# Altium PCB ESC.PcbDoc_Small.PcbDoc (part 1 of 2)
Units mil, origin at the board's own origin, x right, y up, seen from the top; angles counter-clockwise.
Board outline 6500 x 4500 mil, 2 copper layers (Top Layer, Bottom Layer), stack 33.512 mil thick; 85 components, 105 nets, 407 pads, 133 vias.
Unrouted connection lines stored in the file: 8.
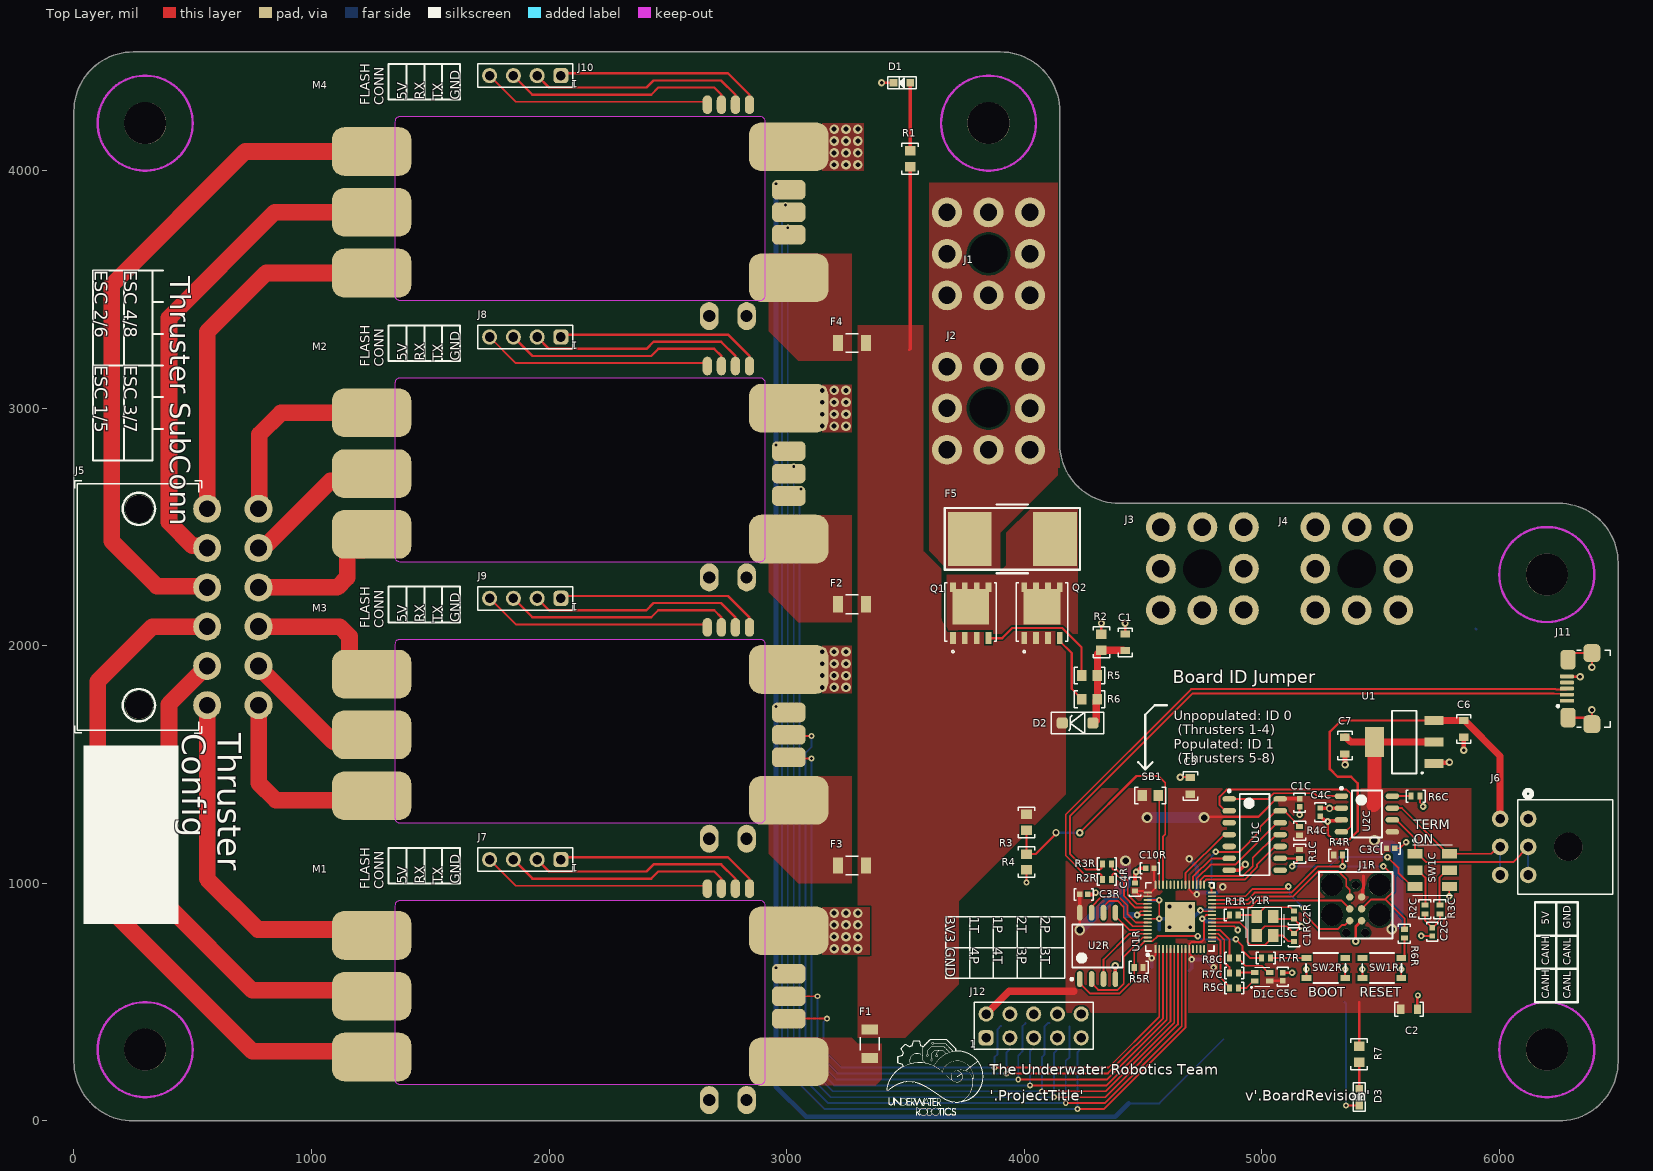
[diagram p0: Top Layer view]
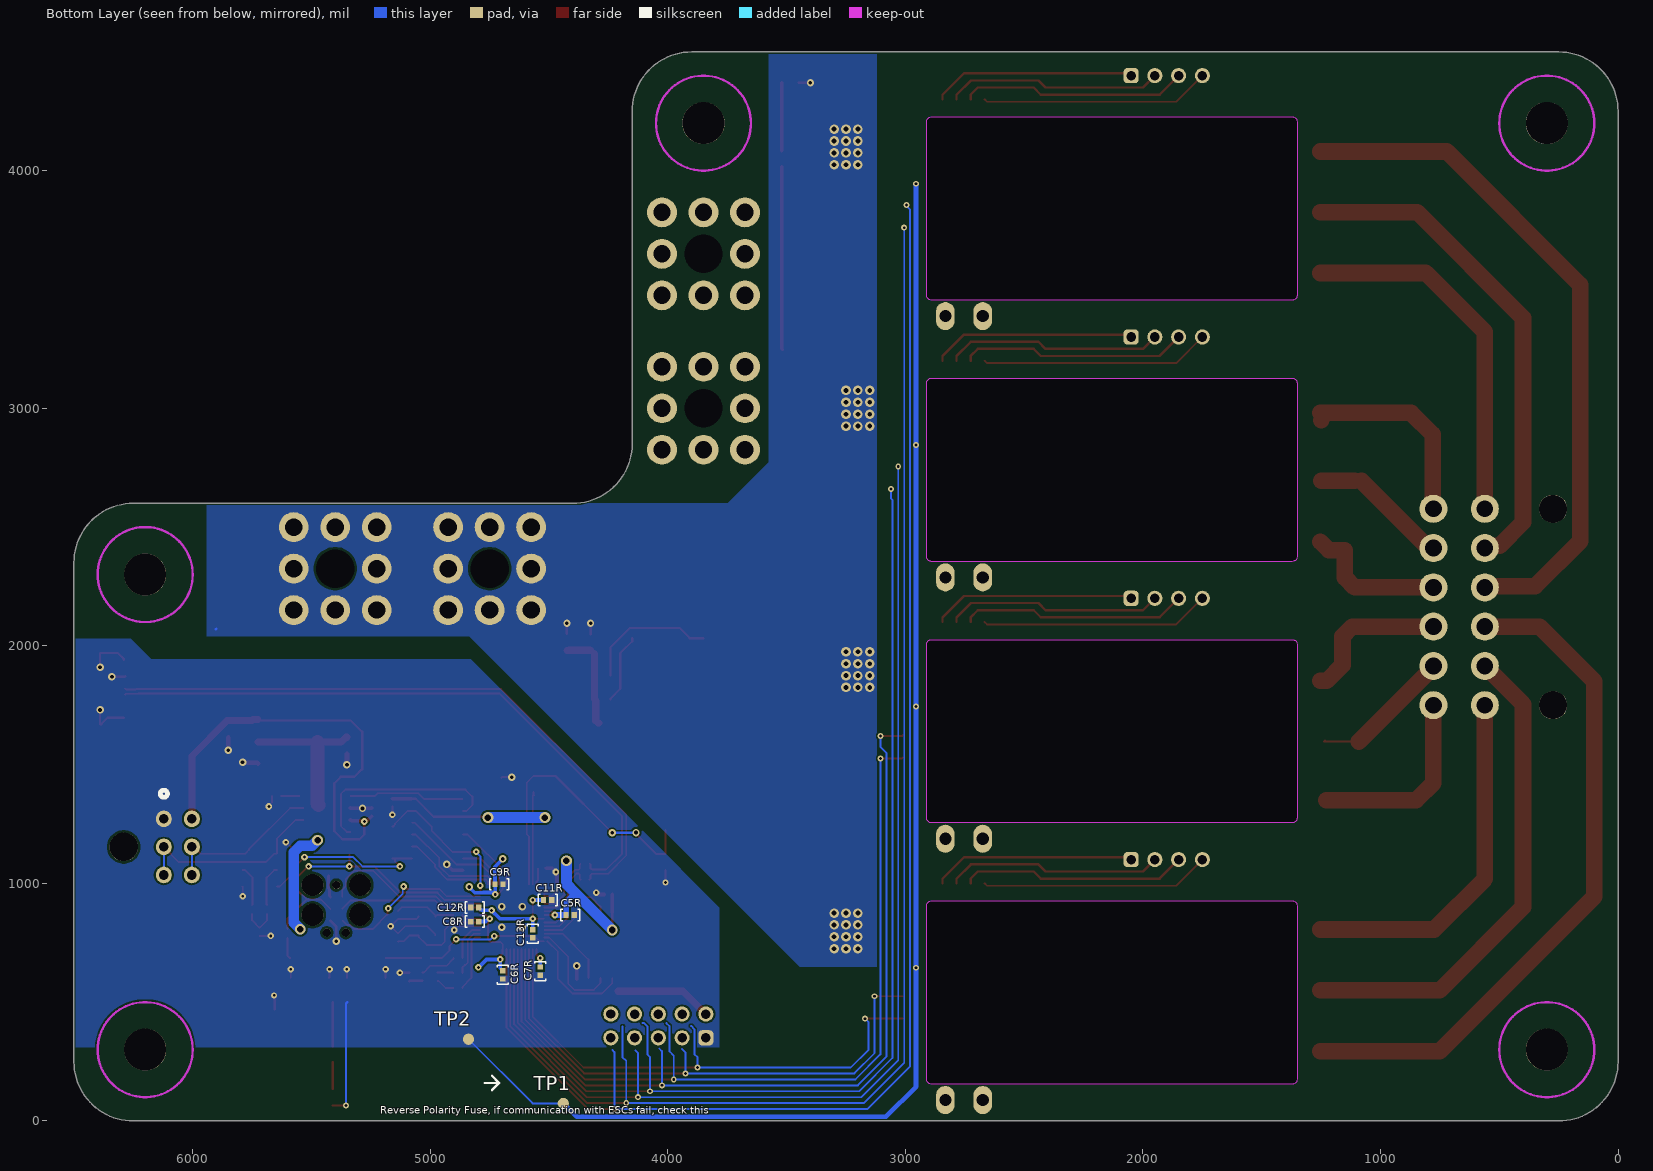
[diagram p1: Bottom Layer view, seen from below]
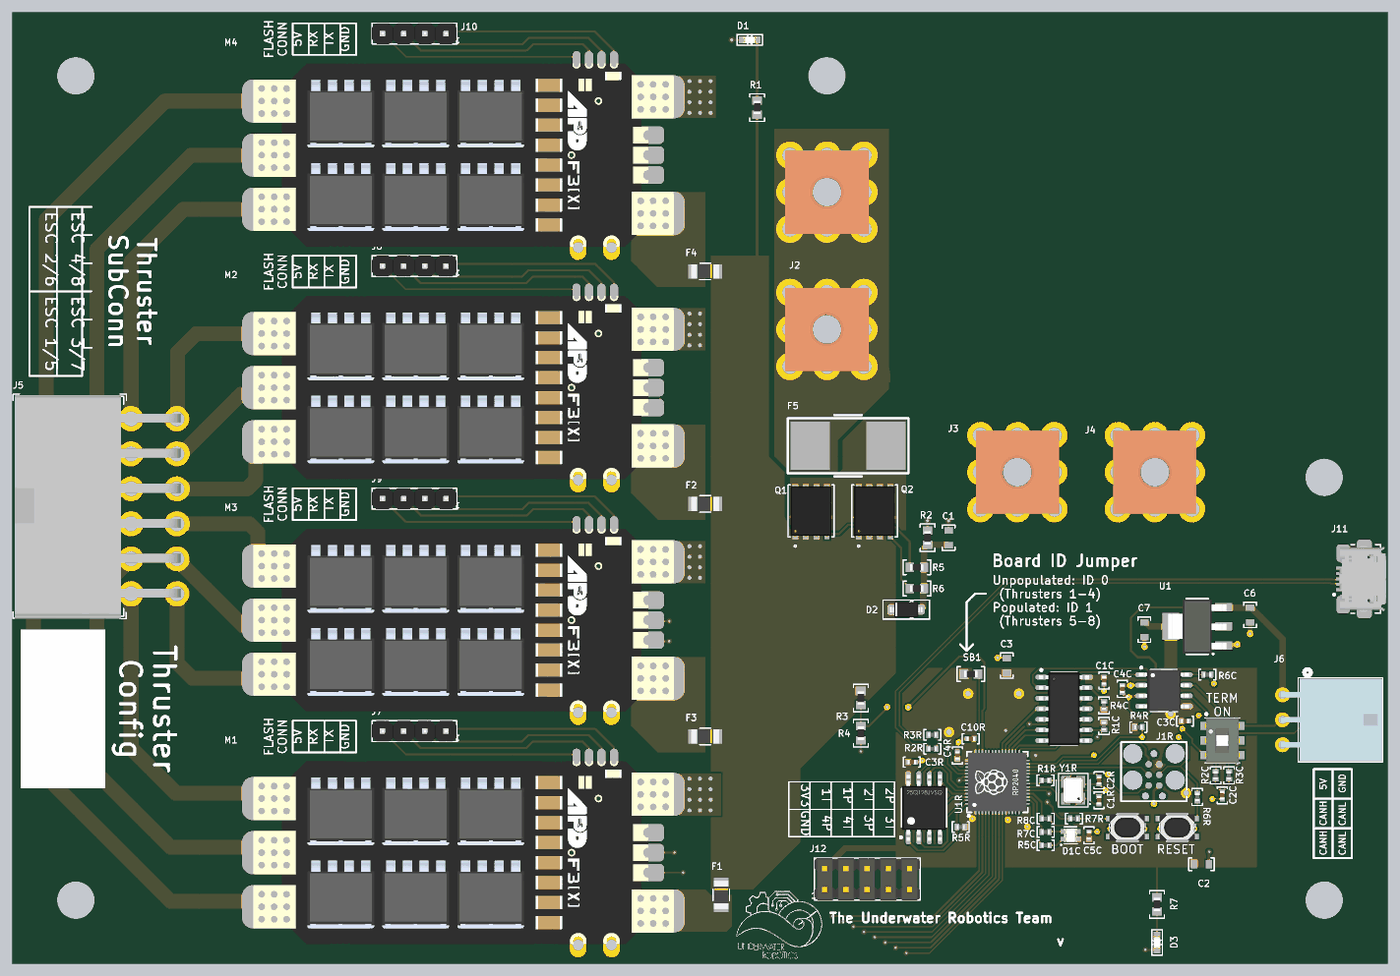
[diagram p3: 3D render of the assembled board from above, using the file's embedded part models]
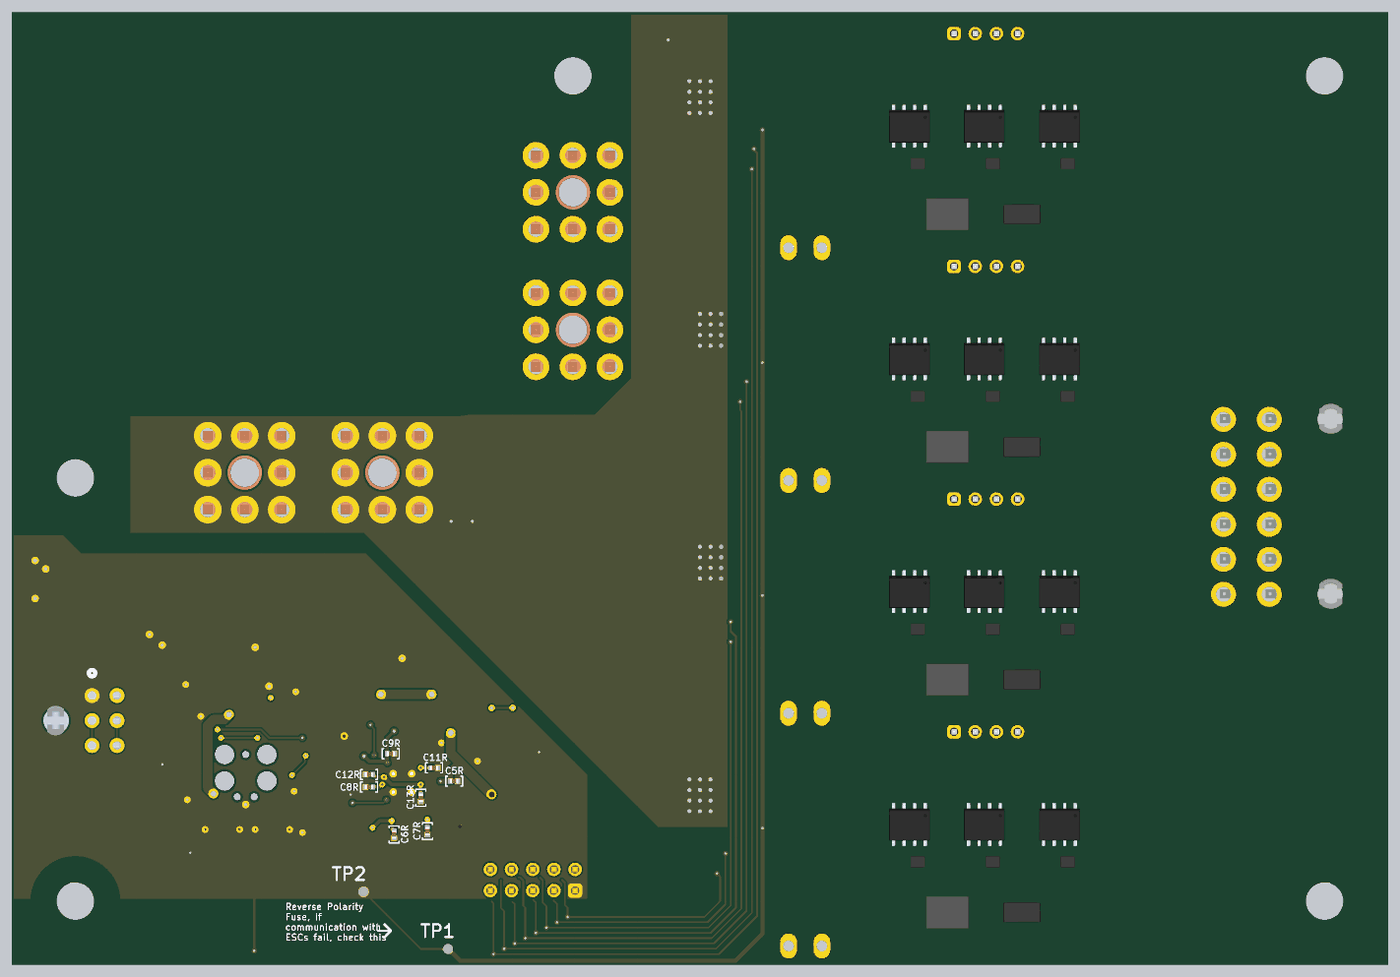
[diagram p4: 3D render of the assembled board from below, using the file's embedded part models]

## Layer stack, top to bottom
Top Solder: solder mask 1, SM-001, Dk 4
Top Layer: signal copper 2.7559
Dielectric 3: core 28, Core-039, Dk 4.8
Bottom Layer: signal copper 2.7559
Bottom Solder: solder mask 1, SM-001, Dk 4

## Board outline
250,4500 ccw(c250,4250) 0,4250 0,250 ccw(c250,250) 250,0 6250,0 ccw(c6250,250) 6500,250 6500,2350 ccw(c6250,2350) 6250,2600 4400,2600 cw(c4400,2850) 4150,2850 4150,4250 ccw(c3900,4250) 3900,4500 3550,4500

## Design rules (kind name [scope] priority, off if disabled: settings)
AcuteAngle [All] p1: minimum=6.00000000000000E+0001 checktracksonly=FALSE
BoardOutlineClearance "BoardOutlineClearance JLCPCB" [All] p1: gap=7.87 ignorepadtopadclearanceinfootprint=FALSE
Clearance "Clearance JLCPCB 4 layer" [All] p1: gap=7.87 ignorepadtopadclearanceinfootprint=FALSE except(5: SMDPad-SMDPad; 6.3: Arc-Arc Arc-Track Arc-SMDPad Track-Track Track-SMDPad; 10: Arc-Hole Track-Hole SMDPad-Hole THPad-Hole Via-Hole Fill-Hole Poly-Hole Region-Hole Text-Hole)
DiffPairsRouting [All] p1: maxlimit=10 minlimit=6 mostfreqgap=8 toplayer_minwidth=3.54 toplayer_maxwidth=15 toplayer_prefwidth=8 bottomlayer_minwidth=3.54 bottomlayer_maxwidth=15 bottomlayer_prefwidth=8 maxuncoupledlength=500
HoleSize "HoleSize JLCPCB Pad" [IsPad] p1: absolutevalues=TRUE maxlimit=248.03 minlimit=19.68 maxpercent=80.000 minpercent=20.000
HoleSize "HoleSize JLCPCB 4 layer" [All] p2: absolutevalues=TRUE maxlimit=248.03 minlimit=7.87 maxpercent=80.000 minpercent=20.000
HoleToHoleClearance "HoleToHoleClearance JLCPCB" [All] p1: gap=10 allowstackedmicrovias=TRUE
MinimumAnnularRing "MinimumAnnularRing JLCPCB Pad" [IsPad] p1: minimumring=11.81
MinimumAnnularRing "MinimumAnnularRing JLCPCB 1oz" [All] p2: minimumring=5.12
MinimumSolderMaskSliver [All] p1: minsoldermaskwidth=1
PlaneConnect [All] p1: pad.planeconnectstyle=Relief pad.reliefexpansion=20 pad.reliefentries=4 pad.reliefconductorwidth=10 pad.reliefairgap=10 via.planeconnectstyle=Direct via.reliefexpansion=20 via.reliefentries=4 via.reliefconductorwidth=10 via.reliefairgap=10
PolygonConnect [All] p1: connectstyle=Direct reliefconductorwidth=15 reliefentries=4 polygonreliefangle="45 Angle" airgapwidth=10
RoutingVias "RoutingVias JLCPCB 4 layer" [All] p1: holewidth=19.68 width=39.37 viastyle="Through Hole" minholewidth=7.87 minwidth=15.75 maxholewidth=50 maxwidth=80
SilkToSilkClearance [All] p1: silktosilkclearance=3
SilkToSolderMaskClearance "SilkToSolderMaskClearance JLCPCB" [IsPad] p1: minsilkscreentomaskgap=5.91 clearancetoexposedcopper=TRUE
SolderMaskExpansion "SolderMaskExpansion JLCPCB" [All] p1: expansion=1.97 istentingtop=FALSE
SupplyNets "Schematic Supply Nets_6" [InNet('3V3')] p1: voltage=0.000
SupplyNets "Schematic Supply Nets_5" [InNet('VCC')] p2: voltage=0.000
SupplyNets "Schematic Supply Nets_4" [InNet('GND')] p3: voltage=0.000
SupplyNets "Schematic Supply Nets_2" [InNet('dGND')] p4: voltage=0.000
SupplyNets "Schematic Supply Nets" [InNet('VIN')] p5: voltage=0.000
SupplyNets "Schematic Supply Nets_3" [InNet('5V')] p6: voltage=0.000
Width "Width JLCPCB 4 layer" [All] p1: maxlimit=196.85 minlimit=3.54 preferedwidth=9.84 minimp=50.000000 maximp=50.000000 favimp=50.000000
23 further rules are at their usual default settings.

## Classes and differential pairs
component class ESC: C1 C2 C3 C6 C7 D1 D2 D3 F1 F2 F3 F4 F5 J1 J2 J3 J4 J5 J6 J7 J8 J9 J10 J11 J12 M1 M2 M3 M4 Q1 Q2 R1 R2 R3 R4 R5 R6 R7 SB1 TP1 TP2 U1
differential pair class "USB 2.0": USB USB_RP2040
component class U_RP2040_with_CAN: C1C C2C C3C C4C C5C D1C R1C R2C R3C R4C R5C R6C R7C R8C SW1C U1C U2C
component class U_RP2040_C: C1R C2R C3R C4R C5R C6R C7R C8R C9R C10R C11R C12R C13R J1R R1R R2R R3R R4R R5R R6R R7R SW1R SW2R U1R U2R Y1R
differential pair USB: +USB_P -USB_N
differential pair USB_RP2040: +USB_RP2040_P -USB_RP2040_N

## Components (designator, comment, footprint, x,y, rotation, side; value= is the part's Value field where it differs from the comment)
C1 "1uF Ceramic 16V" CAPACITOR_0603 4425,2015 r270 top value=1uF
C1C "100nF Ceramic 25V" CAPACITOR_0402 5159.25,1339.33 r270 top value=0.1uF
C1R "27pF Ceramic 50V" CAPACITOR_0402 5135.63,772.41 r90 top value=27pF
C2 "10uF Ceramic 6.3V" CAPACITOR_0603 5620,470 r0 top
C2C "4700pF Ceramic 25V" CAPACITOR_0402 5718.31,796.03 r90 top value=4.7nF
C2R "27pF Ceramic 50V" CAPACITOR_0402 5135.63,866.89 r270 top value=27pF
C3 "10uF Ceramic 6.3V" CAPACITOR_0603 4700,1410 r90 top
C3C "100nF Ceramic 25V" CAPACITOR_0402 5542.28,1147.21 r0 top value=0.1uF
C3R "100nF Ceramic 6.3V" CAPACITOR_0402 4250.98,953.51 r0 top value=0.1uF
C4C "100nF Ceramic 25V" CAPACITOR_0402 5245.87,1299.96 r90 top value=0.1uF
C4R "1uF Ceramic 16V" CAPACITOR_0402 4466.34,985 r90 top value=1uF
C5C "1uF Ceramic 16V" CAPACITOR_0402 5088.39,607.05 r90 top value=1uF
C5R "100nF Ceramic 6.3V" CAPACITOR_0402 4411.22,866.89 r180 bottom value=0.1uF
C6 "10uF Ceramic 6.3V" CAPACITOR_0603 5850,1650 r270 top
C6R "100nF Ceramic 6.3V" CAPACITOR_0402 4694.69,614.93 r270 bottom value=0.1uF
C7 "10uF Ceramic 6.3V" CAPACITOR_0603 5350,1580 r270 top
C7R "100nF Ceramic 6.3V" CAPACITOR_0402 4537.2,630.67 r270 bottom value=0.1uF
C8R "100nF Ceramic 6.3V" CAPACITOR_0402 4812.8,839.23 r0 bottom value=0.1uF
C9R "100nF Ceramic 6.3V" CAPACITOR_0402 4710.43,996.82 r180 bottom value=0.1uF
C10R "100nF Ceramic 6.3V" CAPACITOR_0402 4529.33,1063.74 r180 top value=0.1uF
C11R "1uF Ceramic 16V" CAPACITOR_0402 4505.71,929.89 r180 bottom value=1uF
C12R "100nF Ceramic 6.3V" CAPACITOR_0402 4812.8,898.39 r0 bottom value=0.1uF
C13R "100nF Ceramic 6.3V" CAPACITOR_0402 4568.7,788.15 r270 bottom value=0.1uF
D1 "150060BS75000" LED_0603 3485,4370 r180 top
D1C "EAST1616RGBB4" LED_0606_4SMD 5001.77,607.05 r0 top
D2 "Zener_Diode_10V_410mW" SOD-123 4225,1675 r180 top
D3 "150060GS75000" LED_0603 5410,100 r270 top
F1 "0685H9150-01" 0501Series_LTF 3350,325 r270 top
F2 "0685H9150-01" 0501Series_LTF 3275,2174.96 r180 top
F3 "0685H9150-01" 0501Series_LTF 3275,1074.96 r180 top
F4 "0685H9150-01" 0501Series_LTF 3275,3274.96 r180 top
F5 "1245HC60-RTR" "2-SMD Fuse" 3950,2450 r0 top
J1 "Redcube M4 Term 85A" "Redcube M4 Term 85A" 3850,3650 r0 top
J1R "TagConnect SWD" TC2030-MCP 5395.47,992.88 r270 top
J2 "Redcube M4 Term 85A" "Redcube M4 Term 85A" 3850,3000 r270 top
J3 "Redcube M4 Term 85A" "Redcube M4 Term 85A" 4750,2325 r0 top
J4 "Redcube M4 Term 85A" "Redcube M4 Term 85A" 5400,2325 r0 top
J5 "Mini-Fit Jr R/A" "CONN_MOLEX_MINIFIT JR_12 POS_R/A" 525.57,2163.39 r270 top
J6 "Microfit+ R/A" CONN_MOLEX_MICROFIT+_6_POS_R/A 6121.36,1153.44 r90 top
J7 "HEADER VERT 2.54MM" HEADER_4PIN_2.54MM 2050,1100 r180 top
J8 "HEADER VERT 2.54MM" HEADER_4PIN_2.54MM 2050,3300 r180 top
J9 "HEADER VERT 2.54MM" HEADER_4PIN_2.54MM 2050,2200 r180 top
J10 "HEADER VERT 2.54MM" HEADER_4PIN_2.54MM 2050,4400 r180 top
J11 "USB_MICRO R/A" CONN_MINIUSB 6390,1820 r90 top
J12 "HEADER DUAL VERT 2.54MM" HEADER_2X5PIN_2.54MM 3840,350 r0 top
M1 "APD 80F3[X]" "APD 80F3[X]" 3005,525 r180 top
M2 "APD 80F3[X]" "APD 80F3[X]" 3005,2725 r180 top
M3 "APD 80F3[X]" "APD 80F3[X]" 3005,1625 r180 top
M4 "APD 80F3[X]" "APD 80F3[X]" 3005,3825 r180 top
Q1 "MOSFET P-Ch 30V 60A SO-8" MOSFET_7DP-T1-GE3_VIS 3775,2140 r90 top
Q2 "MOSFET P-Ch 30V 60A SO-8" MOSFET_7DP-T1-GE3_VIS 4075,2140 r90 top
R1 "1k Ohm 5% 1/8W" RESISTOR_0603 3520,4050 r90 top
R1C "10k Ohm 1% 1/16W" RESISTOR_0402 5159.25,1124.18 r270 top
R1R "1k Ohm 1% 1/16W" RESISTOR_0402 4882.6,866.89 r0 top
R2 "1k Ohm 5% 1/8W" RESISTOR_0603 4325,2015 r90 top
R2C "60.4 Ohm 1% 1/16W" RESISTOR_0402 5686.81,890.52 r270 top
R2R "27 Ohm 1% 1/16W" RESISTOR_0402 4348.23,1016.5 r0 top
R3 "10k Ohm 0.5% 1/10W" RESISTOR_0603 4010,1256.5 r270 top
R3C "60.4 Ohm 1% 1/16W" RESISTOR_0402 5749.8,890.52 r270 top
R3R "27 Ohm 1% 1/16W" RESISTOR_0402 4348.23,1082.51 r0 top
R4 "1k Ohm 5% 1/10W" RESISTOR_0603 4010,1090 r270 top
R4C "10k Ohm 1% 1/16W" RESISTOR_0402 5159.25,1221.22 r90 top
R4R "10k Ohm 1% 1/16W" RESISTOR_0402 5321.65,1118.86 r0 top
R5 "27 Ohm 5% 1/8W" RESISTOR_0603 4275,1875 r0 top
R5C "604 Ohm 1% 1/16W" RESISTOR_0402 4883.66,559.81 r0 top
R5R "10k Ohm 1% 1/16W" RESISTOR_0402 4482.09,646.42 r180 top
R6 "27 Ohm 5% 1/8W" RESISTOR_0603 4275,1775 r180 top
R6C "10k Ohm 1% 1/16W" RESISTOR_0402 5647.44,1367.09 r0 top
R6R "1k Ohm 1% 1/16W" RESISTOR_0402 5600.2,788.15 r90 top
R7 "62 Ohm 1% 1/4W" RESISTOR_0603 5410,280 r90 top
R7C "200 Ohm 1% 1/16W" RESISTOR_0402 4883.66,622.8 r0 top
R7R "1k Ohm 1% 1/16W" RESISTOR_0402 5017.52,685.79 r180 top
R8C "200 Ohm 1% 1/16W" RESISTOR_0402 4883.66,685.79 r0 top
SB1 "0 Ohm Jumper No Fit" RESISTOR_0603 4530,1370 r180 top
SW1C "Switch DPDT" CAS-220TA 5718.31,1055.87 r270 top
SW1R "434123025826" SMD_434123025826 5505.71,643.47 r0 top
SW2R "434123025826" SMD_434123025826 5269.49,643.47 r0 top
TP1 "PCB Test Point" TESTPOINT_1.2MM 4440,74 r90 bottom
TP2 "PCB Test Point" TESTPOINT_1.2MM 4839,344 r90 bottom
U1 "LM1117IMPX-3.3/NOPB" SOT-223-4 5600,1595 r180 top
U1C "MCP2517FD" SOIC-14 4970.28,1205.48 r0 top
U1R "RP2040" "QFN-56 RP2040" 4655.31,859.02 r90 top locked
U2C "CAN Transceiver" SOIC-8 5442.72,1292.09 r0 top
U2R "W25Q128JVSIQ" "SOIC-8 W25QxJV" 4308.86,736.92 r90 top
Y1R "CRYSTAL 12.0000MHZ 18PF SMD" "4-SMD, NO LEAD CRYSTAL 3.2x2.5mm" 5049.02,780.28 r90 top

## Footprints (in the part's own frame and the unit in brackets; to place one, negate y for a bottom-side part, rotate by r counter-clockwise, add the part's x,y. Pads: shape width x height; smd on the part's side, far side on the other; paste and mask are expansions set on the pad)
"2-SMD Fuse" [mm]
  rect 4.7x5.8 smd paste+0 mask+0: 1(-4.55,0) 2(4.55,0)
  silkscreen extent -7.24,-3.68 7.24,3.68
"4-SMD, NO LEAD CRYSTAL 3.2x2.5mm" [mm]
  rrect0% 1.4x1.1 smd: 1(0,0) 2(2.032,0) 3(2.032,1.778) 4(0,1.778)
  silkscreen extent -1.02,-1.2 3.05,2.92, body extent -0.58,-0.36 2.62,2.14, height 0.82
0501Series_LTF [mil]
  rect 42x68 smd paste+0 mask+0: 1(-59.5,0) 2(59.5,0)
  silkscreen extent -26,-39 26,39, body extent -66,-34 66,34, height 23
"APD 80F3[X]" [mm] "Advanced Power Drives 80F3[X] ESC"
  rrect50% 8.5x5.2 smd: 1(-0.1,7) 2(-0.1,-7) 3(44.5,6.5) 4(44.5,0) 5(44.5,-6.5)
  oval 2x3 hole 1.3: 6(4.4,11.1) 7(8.4,11.1)
  rrect50% 3.6x2.1 smd: 8(-0.1,2.4) 9(-0.1,0) 10(-0.1,-2.4)
  oval 1x2 smd: 11(4.1,-11.5) 12(5.6,-11.5) 13(7.1,-11.5) 14(8.6,-11.5)
  Keep-Out Layer board cut-out: 2.4,8.9 2.4,-9.7 2.438,-9.891 2.546,-10.054 2.709,-10.162 2.9,-10.2 2.9,-10.2 41.5,-10.2 41.691,-10.162 41.854,-10.054 41.962,-9.891 42,-9.7 42,-9.7 42,8.9 41.962,9.091 41.854,9.254 41.691,9.362 41.5,9.4 41.5,9.4 2.9,9.4 2.709,9.362 2.546,9.254 2.438,9.091 2.4,8.9
  body extent -3.1,-11 47.4,11, height 4.21
CAPACITOR_0402 [mm]
  rect 0.56x0.6 smd: 1(-0.435,0) 2(0.435,0)
  silkscreen extent -1.02,-0.6 1.02,0.6, body extent -0.5,-0.28 0.5,0.27, height 0.51
CAPACITOR_0603 [mil] "CAPACITOR 0603"
  rect 30x40 smd: 1(-35,0) 2(35,0)
  silkscreen extent -60,-30 60,30, body extent -31,-16 32,16, height 31
CAS-220TA [mm] "SWITCH SLIDE DPDT 100MA 6V"
  rrect0% 1x1.6 smd: 1(-1.75,-1.85) 2(0,-1.85) 3(1.75,-1.85) 4(-1.75,1.85) 5(0,1.85) 6(1.75,1.85)
  silkscreen extent -3.3,-2.1 2.7,2.1, body extent -2.7,-2.1 2.7,2.1, height 2.51
CONN_MINIUSB [mm] "USB2.0 Micro-B Receptacle SMD R/A"
  rrect50% 0.4x1.5 smd: 1(-1.3,2.675) 2(-0.65,2.675) 3(0,2.675) 4(0.65,2.675) 5(1.3,2.675)
  rrect50% 2.1x1.6 smd: 6(-3.1,2.55) 7(3.1,2.55)
  rrect50% 1.9x1.8 smd: 8(3.8,0) 9(-3.8,0)
  silkscreen extent -4.14,-1.96 4.11,3.75, body extent -3.96,-2.67 3.96,2.99, height 2.72
CONN_MOLEX_MICROFIT+_6_POS_R/A [mil] "CONN HEADER R/A 6POS 3MM"
  round 70 / inner round 70 / far side oval 70x66.93 hole 40 paste-99999 mask+0: 1(118.11,0) 2(0,0) 3(-118.11,0) 4(118.11,118.11) 5(0,118.11) 6(-118.11,118.11)
  round 120 / inner round 60 / far side round 120 hole 120 unplated paste-99999 mask-60: 7(0,-169.29)
  silkscreen extent -199,-355 239,45, body extent -194,-353 194,129, height 325
"CONN_MOLEX_MINIFIT JR_12 POS_R/A" [mm] "Molex Minifit Jr 5569 12 Pos R/A"
  round 3 hole 1.801: 1(10.5,0.9) 2(6.3,0.9) 3(2.1,0.9) 4(-2.1,0.9) 7(10.5,6.4) 8(6.3,6.4) 9(2.1,6.4) 10(-2.1,6.4)
  round 3 hole 1.8: 5(-6.3,0.9) 6(-10.5,0.9) 11(-6.3,6.4) 12(-10.5,6.4)
  round 3 hole 3 unplated mask+0: ""(-10.5,-6.4) ""(10.5,-6.4)
  silkscreen extent -13.48,-13.27 13.51,0.33, body extent -13.27,-13.08 13.53,6.85, height 11.01
HEADER_2X5PIN_2.54MM [mm]
  rrect50% 1.62x1.62 hole 1.02: 1(0,0)
  round 1.62 hole 1.02: 2(0,2.54) 3(2.54,0) 4(2.54,2.54) 5(5.08,0) 6(5.08,2.54) 7(7.62,0) 8(7.62,2.54)
  round 1.62 hole 1: 9(10.16,0) 10(10.16,2.54)
  silkscreen extent -1.27,-1.25 11.43,3.79, body extent -1.27,-1.27 11.43,3.81, height 9.5
HEADER_4PIN_2.54MM [mm]
  rrect50% 1.62x1.62 hole 1.02: 1(0,0)
  round 1.62 hole 1.02: 2(2.54,0) 3(5.08,0) 4(7.62,0)
  silkscreen extent -1.27,-1.25 8.89,1.25, body extent -1.27,-1.27 8.89,1.27, height 10.48
LED_0603 [mil] "LED 0603"
  rect 32x32 smd: 1(-35,0) 2(35,0)
  silkscreen extent -60,-25 60,25, body extent -31,-16 32,16, height 28
LED_0606_4SMD [mm]
  rrect0% 0.8x0.55 smd: 1(-0.8,-0.45) 2(-0.8,0.45) 3(0.8,0.45) 4(0.8,-0.45)
  silkscreen extent -1.22,-1.22 0.8,1.02, body extent -0.8,-0.8 0.8,0.8, height 0.35
MOSFET_7DP-T1-GE3_VIS [mil]
  rect 50x24 smd: 1(-107.5,75) 2(-107.5,25) 3(-107.5,-25) 4(-107.5,-75)
  rect 150x154 smd: D(24.5,0)
  rect 40x24 smd: D(107.5,-75) D(107.5,-25) D(107.5,25) D(107.5,75)
  Top Layer region: 1.75,77 1.75,77 1.75,77 1.75,77 1.75,77 1.75,77 1.75,77 1.75,77
  Top Layer region: 1.75,-77 1.75,-77 1.75,-77 1.75,-77 1.75,-77 1.75,-77 1.75,-77 1.75,-77
  silkscreen extent -169,-109 125,109, body extent -121,-101 121,101, height 41
"QFN-56 RP2040" [mm] "QFN, 56-Leads, Body 7.00x7.00mm, Pitch 0.40mm, Thermal Pad 3.10x3.10mm, IPC Medium Density"
  oval 0.875x0.2 smd: 1(-3.437,2.6) 2(-3.437,2.2) 3(-3.437,1.8) 4(-3.437,1.4) 5(-3.437,1) 6(-3.437,0.6) 7(-3.437,0.2) 8(-3.437,-0.2) 9(-3.437,-0.6) 10(-3.437,-1) 11(-3.437,-1.4) 12(-3.437,-1.8) 13(-3.437,-2.2) 14(-3.437,-2.6) 29(3.437,-2.6) 30(3.437,-2.2) 31(3.437,-1.8) 32(3.437,-1.4) 33(3.437,-1) 34(3.437,-0.6) 35(3.437,-0.2) 36(3.437,0.2) 37(3.437,0.6) 38(3.437,1) 39(3.437,1.4) 40(3.437,1.8) 41(3.437,2.2) 42(3.437,2.6)
  oval 0.2x0.875 smd: 15(-2.6,-3.437) 16(-2.2,-3.437) 17(-1.8,-3.437) 18(-1.4,-3.437) 19(-1,-3.437) 20(-0.6,-3.437) 21(-0.2,-3.437) 22(0.2,-3.437) 23(0.6,-3.437) 24(1,-3.437) 25(1.4,-3.437) 26(1.8,-3.437) 27(2.2,-3.437) 28(2.6,-3.437) 43(2.6,3.437) 44(2.2,3.437) 45(1.8,3.437) 46(1.4,3.437) 47(1,3.437) 48(0.6,3.437) 49(0.2,3.437) 50(-0.2,3.437) 51(-0.6,3.437) 52(-1,3.437) 53(-1.4,3.437) 54(-1.8,3.437) 55(-2.2,3.437) 56(-2.6,3.437)
  rect 3.2x3.2 smd: 57(0,0)
  silkscreen extent -4.19,-3.65 3.65,3.65, body extent -3.52,-3.52 3.52,3.52, height 0.85
"Redcube M4 Term 85A" [mm]
  round 3.2 hole 1.85: 1(-4.435,-4.435) 1(-4.435,0) 1(-4.435,4.435) 1(0,-4.435) 1(0,4.435) 1(4.435,-4.435) 1(4.435,0) 1(4.435,4.435)
  round 3.2 hole 4.1 unplated: 8(0,0)
  body extent -5,-5 5,5, height 3
RESISTOR_0402 [mm] "Resistor 0402"
  rect 0.55x0.75 smd: 1(-0.475,0) 2(0.475,0)
  silkscreen extent -1.02,-0.64 1.02,0.64, body extent -0.5,-0.25 0.5,0.25, height 0.25
RESISTOR_0603 [mil] "Resistor 0603"
  rect 40x45 smd: 1(-33.5,0) 2(33.5,0)
  silkscreen extent -65,-35 65,35, body extent -31,-16 32,16, height 16
SMD_434123025826 [mm]
  rect 1.05x0.65 smd: A1(-2.075,1.075) A2(2.075,1.075) B1(-2.075,-1.075) B2(2.075,-1.075)
  silkscreen extent -2.1,-1.6 2.1,1.6, body extent -2.3,-1.6 2.3,1.6, height 2.5
SOD-123 [mm] "Schottky Diode SOD-123"
  rrect50% 1.2x1.22 smd: 1(-1.635,0) 2(1.635,0)
  silkscreen extent -2.79,-1.14 2.79,1.14, body extent -1.95,-0.9 1.95,0.9, height 1.18
SOIC-8 [mm] "SOIC, 8-Leads, Body 4.90x3.90mm, Pitch 1.27mm, IPC Medium Density"
  oval 1.45x0.6 smd: 1(-2.725,1.905) 2(-2.725,0.635) 3(-2.725,-0.635) 4(-2.725,-1.905) 5(2.725,-1.905) 6(2.725,-0.635) 7(2.725,0.635) 8(2.725,1.905)
  silkscreen extent -2.85,-2.5 1.6,2.88, body extent -3,-2.5 3,2.5, height 1.75
"SOIC-8 W25QxJV" [mm] "SOIC, 8-Leads, Body 5.28x5.28mm, Pitch 1.27mm, IPC Medium Density"
  oval 1.7x0.6 smd: 1(-3.55,1.905) 2(-3.55,0.635) 3(-3.55,-0.635) 4(-3.55,-1.905) 5(3.55,-1.905) 6(3.55,-0.635) 7(3.55,0.635) 8(3.55,1.905)
  silkscreen extent -3.67,-2.7 2.3,2.88, body extent -3.95,-2.62 3.95,2.62, height 1.95
SOIC-14 [mm] "SOIC, 14-Leads, Body 8.65x3.90mm, Pitch 1.27mm, IPC Medium Density"
  oval 1.45x0.6 smd: 1(-2.725,3.81) 2(-2.725,2.54) 3(-2.725,1.27) 4(-2.725,0) 5(-2.725,-1.27) 6(-2.725,-2.54) 7(-2.725,-3.81) 8(2.725,-3.81) 9(2.725,-2.54) 10(2.725,-1.27) 11(2.725,0) 12(2.725,1.27) 13(2.725,2.54) 14(2.725,3.81)
  silkscreen extent -2.85,-4.35 1.6,4.78, body extent -3,-4.4 3,4.4, height 1.7
SOT-223-4 [mm]
  rect 2.05x1 smd paste+0 mask+0.102: 1(-3.175,2.3) 2(-3.175,0) 3(-3.175,-2.3)
  rect 2.05x3.25 smd paste+0 mask+0.102: 4(3.175,0)
  silkscreen extent -1.96,-3.35 1.3,3.35, body extent -3.5,-3.25 3.5,3.25, height 1.68
TC2030-MCP [mil]
  round 31 smd: 1(50,-25) 2(50,25) 3(100,-25) 4(100,25) 5(150,-25) 6(150,25)
  round 34 hole 35 unplated: A(0,0) B(200,40) C(200,-40)
  round 92 hole 93 unplated: D(0,-100) E(125,-100) F(0,100) G(125,100)
  silkscreen extent -55,-155 225,155
TESTPOINT_1.2MM [mm]
  round 1.2 smd: TP(0,0)

## Part data
C1: library part CAPACITOR_1uF_0603, "Cap 1uF 16V +/-10% / Ceramic 0603", Supplier Part Number 1=399-7847-1-ND, Tolerance="+/- 10%", Voltage=16V, Made By="Flip B", Supplier 1=Digi-Key
C1C C3C C3R C4C C5R C6R C7R C8R C9R C10R C12R C13R: library part CAPACITOR_0.1uF_0402, "Cap 100nF 25V +/-10% / Ceramic 0402", Supplier Part Number 1=478-7868-1-ND, Tolerance="+/- 10%", Voltage=25V, Made By="Robert Pafford", Supplier 1=Digi-Key
C1R C2R: library part CAPACITOR_0.000027uF_0402, "Cap 27pF 50V +/-5% / Ceramic 0402", Supplier Part Number 1=445-5589-1-ND, Tolerance="+/- 5%", Voltage=50V, Made By="Robert Pafford", Supplier 1=Digi-Key
C2 C3 C6 C7: library part CAPACITOR_10uF_0603, "Cap 10uF 6.3V +/-20% / Ceramic 0603", Supplier Part Number 1=1276-1119-1-ND, Tolerance="+/- 20%", Value (uF)="10 uF", Voltage=6.3V, ComponentLink1Description=Digikey, ComponentLink1URL=https://www.digikey.com/en/products/detail/samsung-electro-mechanics/CL10A106MQ8NNNC/3886777, Made By="Flip B", Supplier 1=Digi-Key
C2C: library part CAPACITOR_0.0047uF_0402, "4700 pF +/-10% 25V Ceramic Capacitor X7R 0402", Supplier Part Number 1=478-6195-1-ND, Tolerance="+/- 10%", Voltage=25V, Made By="Robert Pafford", Supplier 1=Digi-Key
C4R C5C C11R: library part CAPACITOR_1uF_0402, "Cap 1uF 16V +/-10% / Ceramic 0402", Supplier Part Number 1=478-0402YD105KAT4ADKR-ND, Tolerance="+/- 10%", Voltage=16V, Made By="Robert Pafford", Supplier 1=Digi-Key
D1: library part LED_Blue_0603, "LED Blue Vf= 3.2V If = 0.020A / 150060BS75000", Color=Blue, Forward Current=20mA, Forward Voltage=3.2V, Package=0603, Supplier Part Number 1=732-4966-1-ND, Made By="Robert Pafford", Supplier 1=Digi-Key
D1C: library part LED_RGB_4SMD, "LED RGB CLEAR 4SMD", Blue Forward Current=5mA, Blue Forward Voltage=2.8V, Color=RGB, Package=4-SMD, Red Forward Voltage=1.8V, Supplier Part Number 1=1080-1552-1-ND, ComponentLink1Description=Datasheet, ComponentLink1URL=https://everlightamericas.com/index.php?controller=attachment&id_attachment=3220, Green Forward Current=5mA, Green Forward Voltage=2.8V, Made By="Robert Pafford", Red Forward Current=5mA, Supplier 1=Digi-Key
D2: "Zener Diode", Package=SOD-123, Power=410mW, Supplier Part Number 1=3757-BZT52-C10_R1_00001CT-ND, Voltage - Zener=10V, ComponentLink1Description=Datasheet, ComponentLink1URL=https://www.panjit.com.tw/upload/datasheet/BZT52-C2V4_SERIES.pdf, Made By="Nathan A", Supplier 1=Digi-Key
D3: library part LED_Green_0603_3.2V, "LED Green Vf= 3.2V If = 0.025A / 150060GS75000", Color=Green, Forward Current=25mA, Forward Voltage=3.2V, Package=0603, Supplier Part Number 1=732-4971-1-ND, ComponentLink1Description=Datasheet, ComponentLink1URL=https://www.we-online.de/katalog/datasheet/150060GS75000.pdf, Made By="Flip B", Supplier 1=Digi-Key
F1 F2 F3 F4: library part "Bel Fuse 15A", "Bel Fuse", Breaking Capacity=150A, Current Rating=15, Package=1206, Voltage Rating=32V, Created By="Nathan Ayer", Manufacturer_Part_Number=0685H9150-01, Mfr_Name="Bel Fuse", Response Time="Fast Blow"
F5: library part "Eaton 60A Fuse", "Eaton", Breaking Capacity=1kA, Current Rating=60A, Package=2-SMD, Voltage Rating=80V, ComponentLink1Description=DigiKey, ComponentLink1URL=https://www.digikey.com/en/products/detail/eaton-electronics-division/1245HC60-RTR/13913536, Created By="Nathan Ayer", Manufacturer_Part_Number=1245HC60-RTR, Mfr_Name=Eaton, Response Time="Fast Blow"
J1 J2 J3 J4: Current Rating="85 A", Created By="Nahtan Ayer", Screw Size=M4
J1R: library part TC2030_SWD, "TagConnect TC2030 ARM SWD 6-pin"
J5: library part "CONN_MOLEX_MINIFIT JR_12POS_R/A", "Molex Minifit Jr. 5569  / 12 Pos R/A Natural", Color=Natural, Current Per Pin=13A, Manufacturer=Molex, Supplier Part Number 1=WM21356-ND, ComponentLink1Description=Datasheet, ComponentLink1URL=https://www.molex.com/pdm_docs/ps/PS-5556-001.pdf, Configuration="Right Angle", Created By="Flip B", Number of Positions=12, Pitch=4.2mm, Series="Minifit Jr 5569", Supplier 1=Digi-Key
J6: library part CONN_MOLEX_MICROFIT+_6POS_R/A, "Molex Microfit+  / 212528 6 POS R/A Black", Color=Black, Current Per Pin=12.5, Manufacturer=Molex, Supplier Part Number 1=900-2125280600-ND, Configuration=R/A, Pitch=3.0mm, Supplier 1=Digikey
J7 J8 J9 J10: library part HEADER_4PIN_2.54MM, "CONN HEADER VERT 4POS 2.54MM", Supplier Part Number 1=S1012E-04-ND, Made By="Robert Pafford", Supplier 1=Digi-Key
J11: library part CONN_MICROUSB, "Amphenol Micro USB-B / USB2.0 5 Pin Right Angle SMD", Color=Silver, Current Per Pin=1.8A, Manufacturer=Amphenol, Supplier Part Number 1=609-4613-1-ND, ComponentLink1Description=Datasheet, ComponentLink1URL=https://cdn.amphenol-icc.com/media/wysiwyg/files/documentation/datasheet/inputoutput/io_usb_micro.pdf?__cf_chl_jschl_tk__=05693735e19256298f6ef6ca2bb2e65c376a4f56-1625503833-0-Abitsb0-ufjOXJYs_S3J3r2iTn-nObalbmXUksF1VvO_h_WEmRdMlUD1I8-hmWSEVWzY1pirKnrPZWfgY3851qyBZe5ZvnNQePLGIzUgdEIQBVUyW36RsbYpDLEWxJ4horD-5gChFgobLYqwmG5aHl0E8lIn_twwPPrOxilK2gP0q9t_CNOs_u5fMqXvXUrlsOv8tIE2NRlu6NVP8qtkL2GjhlkeTUbDMF8WvvpPDTFOgvZ4Y16Ej8F8AhWos88mo5B1HssXozw0XrkJQIqERITUu6rqloz9kf4ZzhBHtDAt-IkiAFY_Ds9SW8FYKKTtINJVpHZQ6Gyu1FFM4Dc9MO0maE8_mmNcwlxqyRoRk_MPWW8VyByXWM5RSp52jteRKw7FeI9WIYvCbPAOy0Eyib-aseIQsnGbglBcUY6_2xp8GYaJM38H3dNvBPsSOfJBPndKedwKHllxjkucXn6xsN0sDXkpGN-cu8_2bDTJ0g-uUucKSCooYX-ApSDNGpkA_p9zv1SOAD8c0zaZVmtiBsN75QpVz2rzq9_BFxOywPvR, Configuration="Right Angle", Created By="Flip B", Number of Positions=5, Pitch=0.65mm, Series=10118192, Supplier 1=Digi-Key
J12: library part HEADER_2x5PIN_2.54MM, "CONN HEADER VERT 10POS 2.54MM", Supplier Part Number 1=732-2672-ND, Made By="Robert Pafford", Supplier 1=Digi-Key
M1 M2 M3 M4: "Advanced Power Drives 80F3[X] ESC", Manufacturer="Advanced Power Drives", Max Current="80A Continuous", Voltage=15-35V, ComponentLink1Description="General Info", ComponentLink1URL=https://powerdrives.net/80f3, ComponentLink2Description="Data Sheet", ComponentLink2URL=https://docs.powerdrives.net/products/f-series-esc/overview, Created By="Nathan Ayer"
Q1 Q2: library part SIR167DP-T1-GE3, "P-Channel 30 V 60A (Tc) 65.8W (Tc) Surface Mount PowerPAK® SO-8", Mfr_Name=Vishay, Copyright="Copyright (C) 2022 Ultra Librarian. All rights reserved.", Manufacturer_Part_Number=SIR167DP-T1-GE3, RefDes=RefDes, Type=DEV
R1 R2: library part RESISTOR_1K_0603, "RES 1k OHM 5% 1/8W 0603", Digikey Part Numer=CR0603-JW-104ELFTR-ND, Supplier Part Number 1=2019-RK73B1JTTD102JCT-ND, Tolerance="+/- 5%", Value  (Ohms)=1K, ComponentLink1Description=Datasheet, ComponentLink1URL=https://www.bourns.com/docs/product-datasheets/CRxxxxx.pdf, Made By="Robert Pafford", Supplier=Digikey, Supplier 1=Digi-Key, Wattage=1/8W
R1C R4C R4R R5R R6C: library part RESISTOR_10K_0402, "RES 10k OHM 1% 1/16W 0402", Digikey Part Numer=CR0603-JW-104ELFTR-ND, Supplier Part Number 1=YAG3436CT-ND, Tolerance="+/- 1%", Value  (Ohms)=10K, Made By="Robert Pafford", Supplier=Digikey, Supplier 1=Digi-Key, Wattage=1/16W
R1R R6R R7R: library part RESISTOR_1K_0402, "RES 1k OHM 1% 1/16W 0402", Digikey Part Numer=CR0603-JW-104ELFTR-ND, Supplier Part Number 1=13-AC0402FR-131KLCT-ND, Tolerance="+/- 1%", Value  (Ohms)=1K, Made By="Robert Pafford", Supplier=Digikey, Supplier 1=Digi-Key, Wattage=1/16W
R2C R3C: library part RESISTOR_60.4_0402, "RES 60.4 OHM 1% 1/16W 0402", Digikey Part Numer=CR0603-JW-104ELFTR-ND, Supplier Part Number 1=13-AC0402FR-0760R4LCT-ND, Tolerance="+/- 1%", Value  (Ohms)=60.4, Made By="Robert Pafford", Supplier=Digikey, Supplier 1=Digi-Key, Wattage=1/16W
R2R R3R: library part RESISTOR_27_0402, "RES 27 OHM 1% 1/16W 0402", Digikey Part Numer=CR0603-JW-104ELFTR-ND, Supplier Part Number 1=YAG5278DKR-ND, Tolerance="+/- 1%", Value  (Ohms)=27, Made By="Robert Pafford", Supplier=Digikey, Supplier 1=Digi-Key, Wattage=1/16W
R3: library part RESISTOR_10K_0.5%_0603, "RES 10k OHM 0.5% 1/10W 0603", Digikey Part Numer=CR0603-JW-104ELFTR-ND, Supplier Part Number 1=749-1695-1-ND, Tolerance="+/- 0.5%", Value  (Ohms)=10K, Made By="Robert Pafford", Supplier=Digikey, Supplier 1=Digi-Key, Wattage=1/10W
R4: library part RESISTOR_1K_0.5%_0603, "RES 1k OHM 0.5% 1/10W 0603", Digikey Part Numer=CR0603-JW-104ELFTR-ND, Supplier Part Number 1=749-1693-1-ND, Tolerance="+/- 0.5%", Value  (Ohms)=1K, Made By="Robert Pafford", Supplier=Digikey, Supplier 1=Digi-Key, Wattage=1/10W
R5 R6: library part RESISTOR_27_0603, "RES 27 OHM 5% 1/8W 0603", Digikey Part Numer=CR0603-JW-104ELFTR-ND, Supplier Part Number 1=2019-RK73B1JTTD270JCT-ND, Tolerance="+/- 5%", Value  (Ohms)=27, ComponentLink1Description=Datasheet, ComponentLink1URL=https://www.bourns.com/docs/product-datasheets/CRxxxxx.pdf, Made By="Robert Pafford", Supplier=Digikey, Supplier 1=Digi-Key, Wattage=1/8W
R5C: library part RESISTOR_604_0402, "RES 604 OHM 1% 1/16W 0402", Digikey Part Numer=CR0603-JW-104ELFTR-ND, Supplier Part Number 1=13-AC0402FR-07604RLCT-ND, Tolerance="+/- 1%", Value  (Ohms)=604, Made By="Robert Pafford", Supplier=Digikey, Supplier 1=Digi-Key, Wattage=1/16W
R7: library part RESISTOR_62_0603, "RES SMD 62 OHM 1% 1/4W 0603", Digikey Part Numer=CR0603-JW-104ELFTR-ND, Supplier Part Number 1=541-RCS060362R0FKEACT-ND, Tolerance="+/- 1%", Value  (Ohms)=62, ComponentLink1Description=Datasheet, ComponentLink1URL=https://www.bourns.com/docs/product-datasheets/CRxxxxx.pdf, Made By="Robert Pafford", Supplier=Digikey, Supplier 1=Digi-Key, Wattage=1/4W
R7C R8C: library part RESISTOR_200_0402, "RES 200 OHM 1% 1/16W 0402", Digikey Part Numer=CR0603-JW-104ELFTR-ND, Supplier Part Number 1=YAG3453CT-ND, Tolerance="+/- 1%", Value  (Ohms)=200, Made By="Robert Pafford", Supplier=Digikey, Supplier 1=Digi-Key, Wattage=1/16W
SB1: library part JUMPER_0_0603, "0 Ohm Jumper No Fit for Solder Bridge", Value  (Ohms)=0, ComponentLink1Description=Digikey, ComponentLink1URL=https://www.digikey.com/en/products/detail/koa-speer-electronics-inc/RK73B1JTTD101J/9844701, Made By="Robert Pafford"
SW1C: library part CAS-220TA_CAN_TERM, "GOLD SWITCH FLUSH SLIDE DPDT 100MA 6V", Current Rating="100 mA", Supplier Part Number 1=CAS220JCT-ND, Voltage Rating=6VDC, Contact Finish=Gold, Made By="Robert Pafford", Supplier 1=Digi-Key, Switch Function=DPDT
SW1R SW2R: library part "Tactile Switch SMD", "WS-TASV J-Bend SMT Tact Switch, SPST-NO, 16VDC, 50mA, 260g", Manufacturer="Wurth Elektronik", Operating Temperature Max=85°C, Operating Temperature Min=-40°C, Rated Current=50mA, Rated Voltage=16VDC, Category="Tact Switches", Circuit=SPST-NO, ComponentLink1Description="Website Link", ComponentLink1URL=https://www.we-online.com/redexpert/article/434123025826?ad, ComponentLink2Description="Datasheet Link", ComponentLink2URL=https://www.we-online.com/redexpert/spec/434123025826?ad, Contact Material="Stainless Steel", Contact Plating=Silver, Height=2.5mm, Length=4.2mm, Manufacturer Part Number=434123025826, Match Code=WS-TASV, Mount="Surface Mount", Operation Force=260g, Packaging="Tape and Reel", Terminal Material="Copper Alloy", Terminal Plating=Silver, Washable=No, Width=3.2mm
TP1 TP2: library part TESTPOINT, Made By="Robert Pafford"
U1: "800-mA 15-V linear voltage regulator 4-SOT-223 -40 to 125", Package="SOT-223-4 Texas Instruments", Arrow_Electronics-Purchase-URL=https://snapeda.com/shop?store=Arrow+Electronics&id=410186, Availability=Good, DigiKey-Purchase-URL=https://snapeda.com/shop?store=DigiKey&id=410186, MF="Texas Instruments", Mouser-Purchase-URL=https://snapeda.com/shop?store=Mouser&id=410186, MP=LM1117IMPX-3.3/NOPB, Price=None, SnapEDA_Link=https://www.snapeda.com/parts/LM1117IMPX-3.3/NOPB/Texas%20Instruments/view-part/410186/?ref=snap, Texas_Instruments-Purchase-URL=https://snapeda.com/shop?store=Texas+Instruments&id=410186
U1C: "CANbus Controller CAN 2.0 SPI Interface 14-SOIC", Made By="Robert Pafford", Max FD Rate="8 Mbps"
U1R: "Raspberry Pi RP2040", Crystal Frequency="12 MHz", Input Voltage=3.3V, Available Busses="SPI, I2C, PWM, USB", ComponentLink1Description=DigiKey, ComponentLink2Description=Datasheet, ComponentLink2URL=https://datasheets.raspberrypi.org/rp2040/rp2040-datasheet.pdf, Made By="Robert Pafford", Number of GPIOs=29
U2C: library part TJA1442AT, "CAN Interface IC High-Speed CAN Transceiver with Standby Mode", Supplier Part Number 1=771-TJA1442AT/0Z, Made By="Robert Pafford", Max Data Rate=5Mbps, Supplier 1=Mouser
U2R: "IC FLASH 128MBIT SPI/QUAD 8SOIC", Supplier Part Number 1=W25Q128JVSIQ-ND, Made By="Robert Pafford", Size=128M, Supplier 1=Digi-Key
Y1R: library part CRYSTAL_12MHz_SMD_SMALL, "12 MHz ±20ppm Crystal 18pF 100 Ohms 4-SMD, No Lead (3.2x2.5mm)", Frequency="12 MHz", Load Capacitance=18pF, Supplier Part Number 1=2151-RH100-12.000-18-2030-EXT-TRCT-ND, ESR="100 Ohms", Made By="Robert Pafford", Supplier 1=Digi-Key

## Free pads (board coordinates)
  round 177 hole 177 unplated mask-99999: 2(300,300) 2(300,4200) 2(3850,4200) 2(6200,300) 2(6200,2300)

## Via types
v1: diameter 40, hole 20, Top Layer to Bottom Layer, tented both sides, 48 vias
v2: diameter 27.56, hole 11.81, Top Layer to Bottom Layer, 25 vias
v3: diameter 25, hole 12, Top Layer to Bottom Layer, tented both sides, 23 vias
v4: diameter 31.5, hole 15.75, Top Layer to Bottom Layer, 16 vias
v5: diameter 27.56, hole 11.81, Top Layer to Bottom Layer, tented top, 9 vias
v6: diameter 45.28, hole 27.56, Top Layer to Bottom Layer, 6 vias
v7: diameter 31.5, hole 15.75, Top Layer to Bottom Layer, tented top, 3 vias
v8: diameter 30, hole 15, Top Layer to Bottom Layer, tented both sides, 3 vias

## Nets (pads, with @x,y where several pads share a name; then routed paths per layer and width w, separated by ;. In a path a pad name is that pad's centre, name@x,y a point inside that pad or via, vN(x,y) a via of type N, cw(c..) or ccw(c..) an arc to the next point about the centre after c; other vN are vias at no path point)
1v1_RP2040: C11R.1 C12R.1 C13R.1 U1R.23 U1R.45 U1R.50 | length 566.9
  Top Layer w7.87: U1R.50@4519.98,851.15 v2(4568.7,851.15) v2(4568.7,929.89) U1R.45@4519.98,929.89 ; v2@4741.93,890.52 4747.26,890.52 4755.13,882.64 U1R.23@4790.65,882.64
  Bottom Layer w15.75: C11R.1@4522.83,929.89 v2(4568.7,929.89) ; C13R.1@4568.7,805.28 v2(4568.7,851.15) 4706.6,851.15 v2(4741.93,886.47) 4783.75,886.47 4787.8,890.52 4788.58,890.52 4795.67,897.6 C12R.1@4795.67,898.39
3V3: C1C.1 C2.1 C3.1 C3C.1 C3R.1 C4R.1 C5C.1 C5R.1 C6R.1 C7.1 C7R.1 C8R.1 C9R.1 C10R.1 D1C.4 J1R.2 J12.2 R1C.1 R4C.1 R4R.1 R5R.1 R7.2 SB1.2 U1.2 U1.4 U1C.14 U1R.1 U1R.10 U1R.22 U1R.33 U1R.42 U1R.43 U1R.44 U1R.48 U1R.49 U2C.5 U2R.8 | length 4458.8
  Top Layer w7.87: C4R.1@4466.34,967.88 C4R.1@4467.13,967.88 ; U1R.49@4519.98,866.89 v5(4475.2,866.89) 4490.94,882.64 U1R.48@4519.98,882.64 ; U1R.43@4533.27,961.38 4552.95,981.07 U1R.42@4552.95,994.35 4552.95,1007.64 4551.07,1007.64 4546.46,1012.25 C10R.1@4546.46,1063.74 ; v2(4537.2,685.79) 4540.09,685.79 4552.95,698.65 U1R.1@4552.95,723.69 ; U1R.33@4694.69,994.35 4694.69,974.54 4711.95,957.27 4722.41,957.27 v5(4726.18,953.51) ; v2(4705,680) 4705,696.22 4704.56,696.22 4696.26,704.53 4696.26,722.11 U1R.10@4694.69,723.69 4694.69,743.5 4703.91,752.72 4720.16,752.72 4745.87,752.72 4756.35,763.2 4756.35,839.27 4749.8,845.82 v2(4749.8,851.15) 4765.55,866.89 U1R.22@4790.65,866.89 ; C1C.1@5158.76,1355.97 C1C.1@5159.25,1356.46 ; C4R.1@4467.13,967.88 4474.21,960.79 4474.21,960 4488.58,945.63 U1R.44@4519.98,945.63 U1R.43@4519.98,961.38 4506.69,961.38 4500.2,967.88 C4R.1@4467.13,967.88
  Top Layer w9.84: v6(4233.86,803.9) U2R.8@4233.86,876.68 ; v6(4757.28,1277.21) 4760.16,1280.08 4985.43,1280.08 5061.32,1355.97 U1C.14@5078.05,1355.97 ; D1C.4@5033.27,589.33 5033.56,589.63 5085.98,589.63 C5C.1@5088.39,587.22 ; R7.2@5410,313.5 5410,500
  Top Layer w10: C5C.1@5088.39,587.22 C5C.1@5088.39,589.35
  Top Layer w11.81: J1R.2@5420.47,942.88 5424.14,946.55 5424.14,974.31 5428.88,979.04 5428.88,1030.34 5426.97,1032.25
  Top Layer w15.75: U2R.8@4233.86,876.68 C3R.1@4233.86,953.51 ; U1C.14@5078.05,1355.97 C1C.1@5158.76,1355.97
  Top Layer w30: J12.2@3840,450 3936,546 4209,546 ; C7.1@5350,1615 5355,1615 5375,1595 U1.4@5475,1595 U1.2@5725,1595
  Top Layer w60: 5470,1330 5475,1335 U1.4@5475,1595
  Bottom Layer w15.75: C7R.1@4537.2,647.8 v2(4537.2,685.79) ; C6R.1@4694.69,632.05 4705,642.37 v2(4705,680) 4763.47,680 v2(4797.05,646.42) ; v7(4694.69,1103.11) 4727.56,1070.24 C9R.1@4727.56,996.82 4726.87,996.13 v5@4726.87,961.38 ; v5(4726.18,953.51) 4734.06,961.38 4776.55,961.38 4776.94,960.99 4812.4,960.99 v7(4836.42,985) ; v2(4749.8,851.15) 4755.13,851.15 4767.05,839.23 C8R.1@4795.67,839.23
  Bottom Layer w23.62: 4389.47,959.51 4428.35,920.63 C5R.1@4428.35,866.89 v5(4475.2,866.89)
  Bottom Layer w45.28: v6(4233.86,803.9) 4389.47,959.51 4426.97,997.01 v6(4426.97,1095.24) ; v6(4517.28,1277.21) v6(4757.28,1277.21) ; v6(5474.21,1181.85) 5498.03,1158.04 5547.68,1158.04 5574.61,1131.1 5574.61,835.1 5547.28,807.77 v6(5547.28,807.21)
5V: C4C.1 C6.1 J6.4 U1.3 U2C.3 | length 1869.4
  Top Layer w10: v2(5277.36,1260.59) 5277.36,1206.64 5298,1186 5370,1186 5404,1220 5404,1421 5376,1449 5319,1449 5287,1481 5287,1638 5334.55,1685.55 U1.3@5725,1685.55
  Top Layer w15.75: C4C.1@5245.87,1282.84 5246.65,1282.84 5265.13,1264.36 5273.6,1264.36 v2(5277.36,1260.59) 5280.85,1264.08 5332.42,1264.08 U2C.3@5335.43,1267.09
  Top Layer w30: U1.3@5725,1690.55 5745.67,1690.55 5751.22,1685 C6.1@5850,1685 5855,1685 6003.25,1536.75 J6.4@6003.25,1271.55
CANCLK_RP2CAN: U1C.6 U1R.32 | length 217.8
  Top Layer w7.87: U1R.32@4710.43,994.35 4710.43,1027.21 4788.7,1105.48 U1C.6@4862.99,1105.48
CANH: J6.5 J6.6 SW1C.4 U2C.7 | length 681.6
  Top Layer w7.87: U2C.7@5533.27,1317.09 U2C.7@5550,1317.09 5590.35,1317.09 5763.58,1143.86 5763.58,1140.52 5779.33,1124.77 SW1C.4@5791.14,1124.77 5965.72,1124.77 5994.39,1153.44 J6.5@6003.25,1153.44
  Bottom Layer w7.87: J6.6@6003.25,1035.33 J6.5@6003.25,1153.44